# Altium PCB PVPanel.PcbDoc
Units mm, origin at the board's own origin, x right, y up, seen from the top; angles counter-clockwise.
Board outline 60 x 22.7 mm, 2 copper layers (Top Layer, Bottom Layer); 1 components, 0 nets, 1 pads, 0 vias.
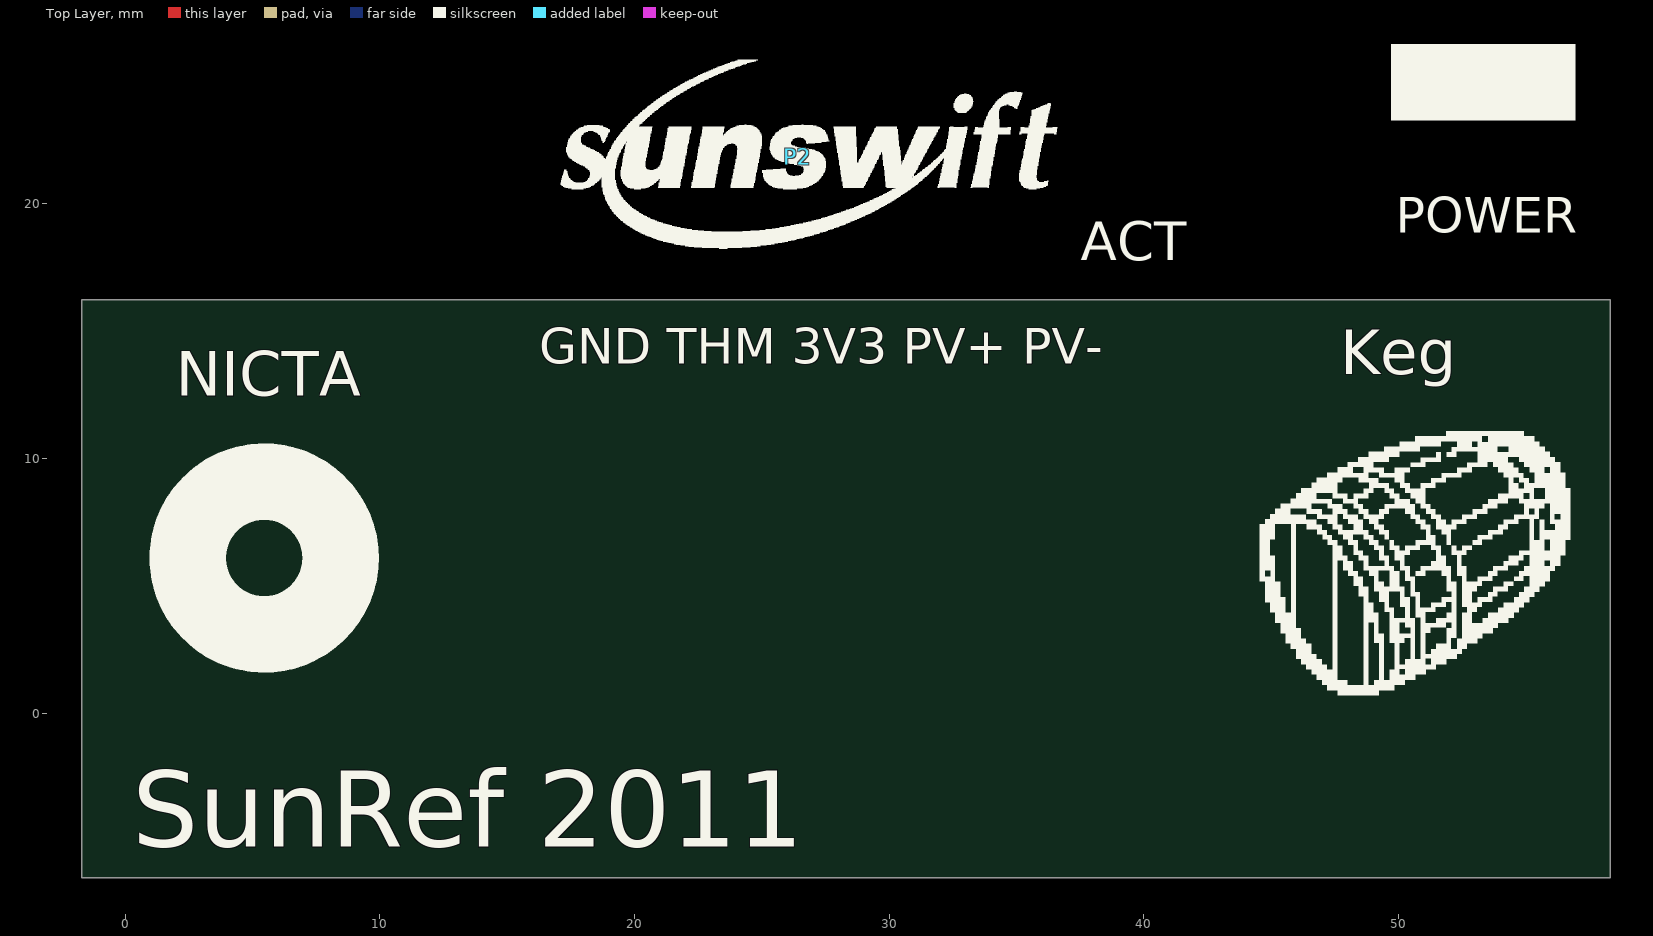
[diagram p0: Top Layer view]
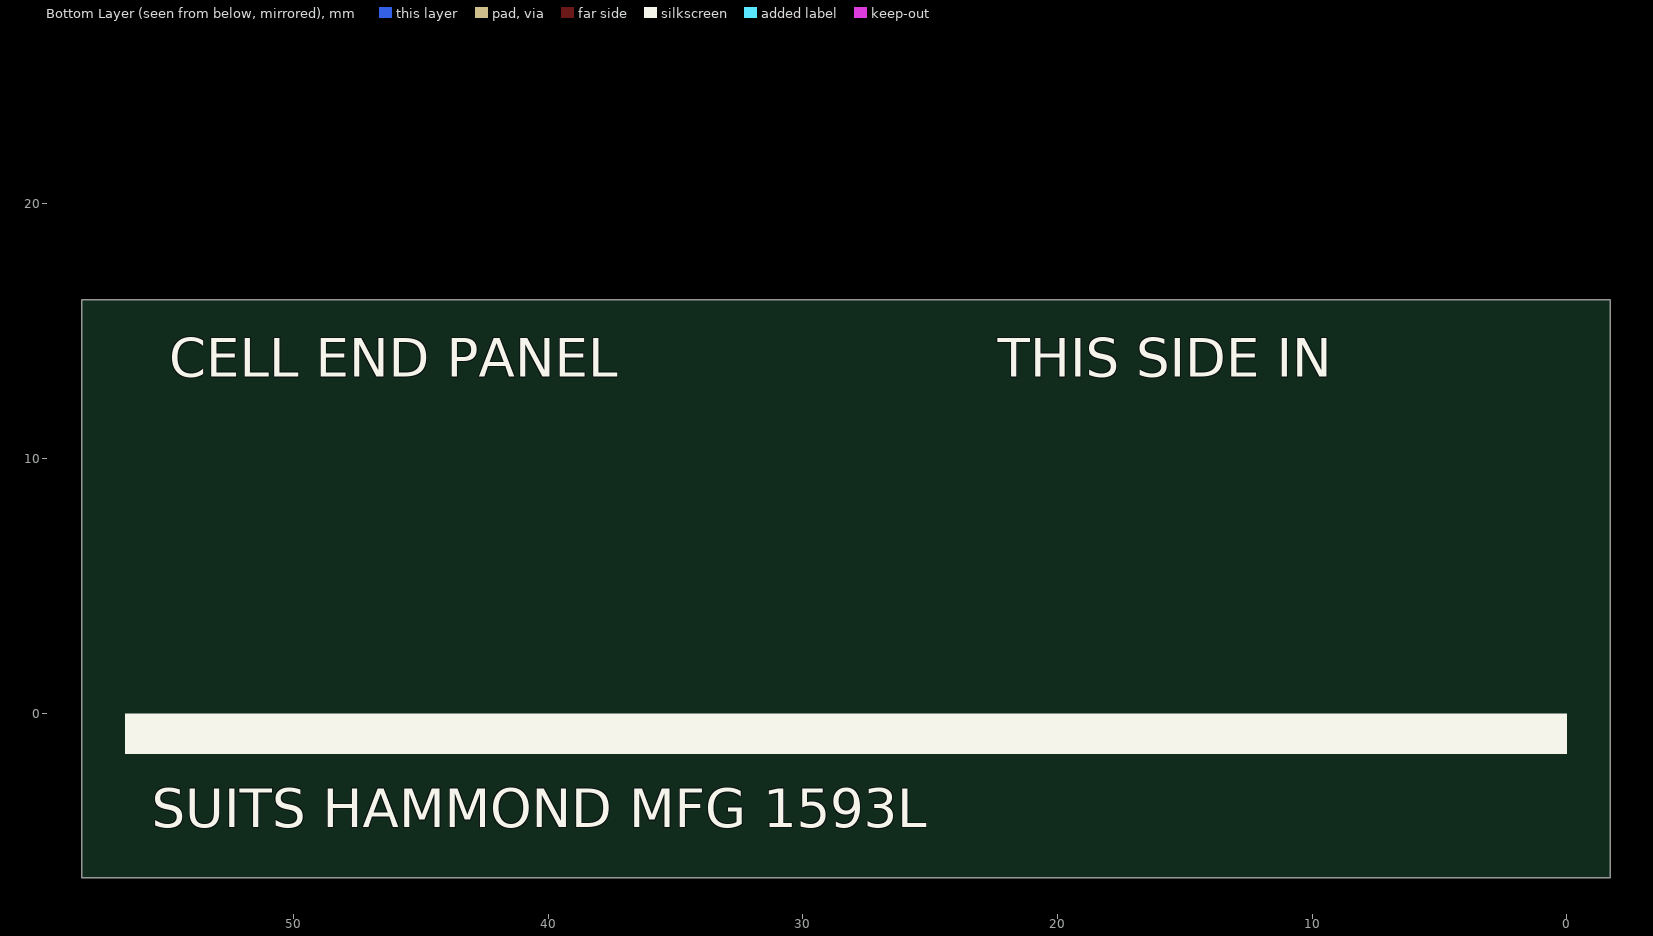
[diagram p1: Bottom Layer view, seen from below]

## Layer stack, top to bottom
Top Layer: signal copper 0.0356
Dielectric: dielectric 0.32, FR-4, Dk 4.8
Bottom Layer: signal copper 0.0356

## Board outline
-1.699,-6.454 58.301,-6.454 58.296,16.246 -1.699,16.246

## Design rules (kind name [scope] priority, off if disabled: settings)
Clearance [All] p1: gap=0.254
PolygonConnect [All] p1: connectstyle=Relief reliefconductorwidth=0.254 reliefentries=4 polygonreliefangle="90 Angle"
RoutingVias [All] p1: holewidth=0.711 width=1.27 viastyle="Through Hole" minholewidth=0.711 minwidth=1.27 maxholewidth=0.711 maxwidth=1.27
SilkscreenOverComponentPads [All] p1: minsilkscreentomaskgap=0.254
SolderMaskExpansion [All] p1: expansion=0.102
Width [All] p1: maxlimit=0.254 minlimit=0.254 preferedwidth=0.254
27 further rules are at their usual default settings.

## Components (designator, comment, footprint, x,y, rotation, side; value= is the part's Value field where it differs from the comment)
P2 "SUN_LOGO" SUNSWIFTLOGO 26.416,21.844 r0 top (schematic designator P1)

## Footprints (in the part's own frame and the unit in brackets; to place one, negate y for a bottom-side part, rotate by r counter-clockwise, add the part's x,y. Pads: shape width x height; smd on the part's side, far side on the other; paste and mask are expansions set on the pad)
SUNSWIFTLOGO [mm] "Sunswift Logo"
  silkscreen extent -9.32,-3.58 10.19,3.81

## Free pads (board coordinates)
  round 3 on Top Overlay mask+0.2: 2(11.201,5.639)

## Nets (pads, with @x,y where several pads share a name; then routed paths per layer and width w, separated by ;. In a path a pad name is that pad's centre, name@x,y a point inside that pad or via, vN(x,y) a via of type N, cw(c..) or ccw(c..) an arc to the next point about the centre after c; other vN are vias at no path point)

## Silkscreen, mask and mechanical layers (free items; w line width, h text height)
Top Overlay:
  circle w3: c5.458,6.096 r3
  rectangle: 49.69,23.27 56.94,26.27
  rectangle: 49.69,28.47 56.94,31.47
  region: 137 vertices and 55 holes, not listed, extent 44.552,0.711 56.744,11.074
  text "POWER" at 49.89,18.87 h1.4
  text "ACT" at 37.516,17.78 h1.52
  text "GND THM 3V3 PV+ PV-" at 16.256,13.716 h1.4
  text "Keg" at 47.701,12.725 h3
  text "NICTA" at 1.981,11.887 h3
  text "SunRef 2011" at 0.279,-5.232 h3
Bottom Overlay:
  rectangle: 0.001,-1.604 56.601,-0.004
  text "THIS SIDE IN" at 22.352,13.208 h1.52
  text "CELL END PANEL" at 54.864,13.208 h1.52
  text "SUITS HAMMOND MFG 1593L" at 55.551,-4.479 h1.52
Mechanical 1:
  circle w0.254: c39.167,22.141 r1.6
  circle w0.254: c47.95,29.87 r1.6
  circle w0.254: c47.95,24.79 r1.6
  circle w0.254: c47.95,19.71 r1.6
  lines w0.254: 58.296,16.246 58.301,-6.454 -1.699,-6.454 -1.699,16.246 31.311,16.246 58.301,16.246 ; 15.24,-0.508 15.24,12.5 42.24,12.5 42.24,-0.508 15.24,-0.508